# Altium PCB optical.PcbDoc
Units mm, origin at the board's own origin, x right, y up, seen from the top; angles counter-clockwise.
Board outline 29.57 x 17.04 mm, 2 copper layers (Top Layer, Bottom Layer); 20 components, 24 nets, 92 pads, 52 vias.
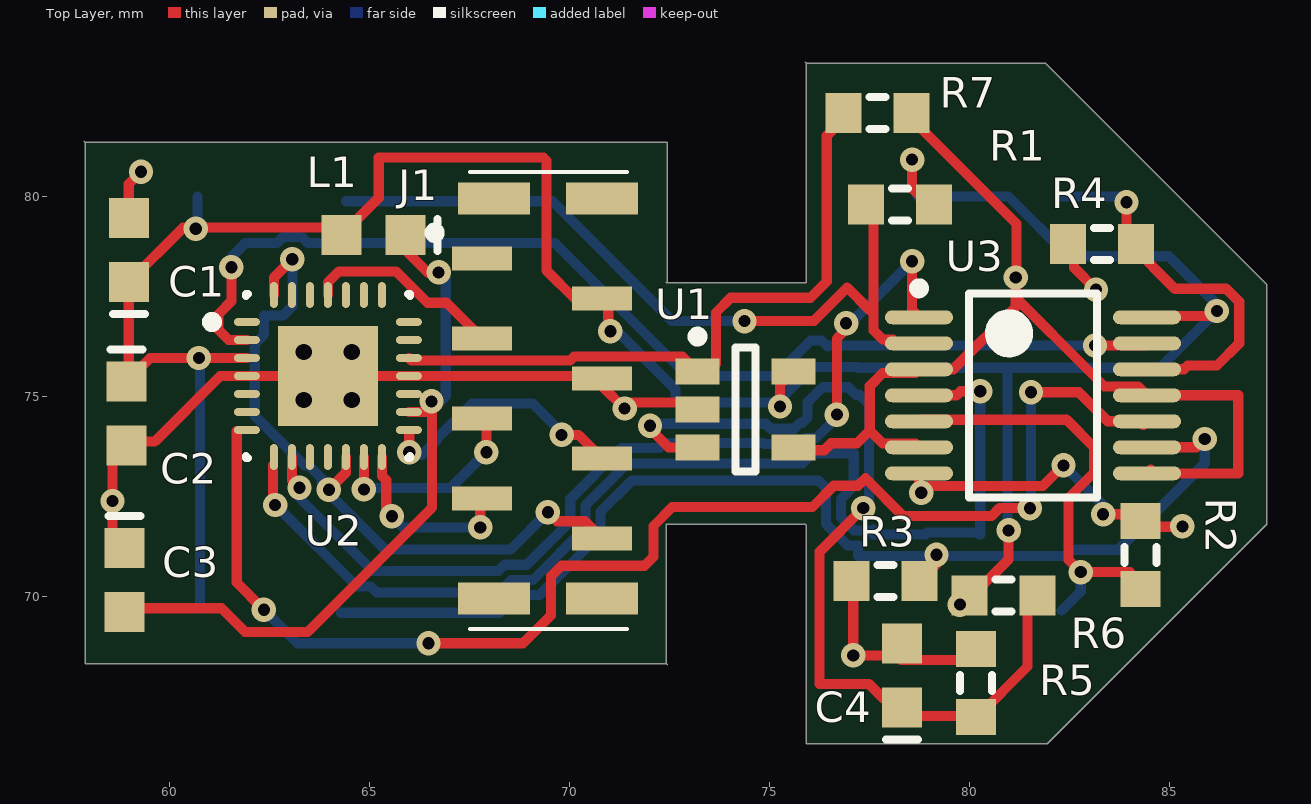
[diagram p0: Top Layer view]
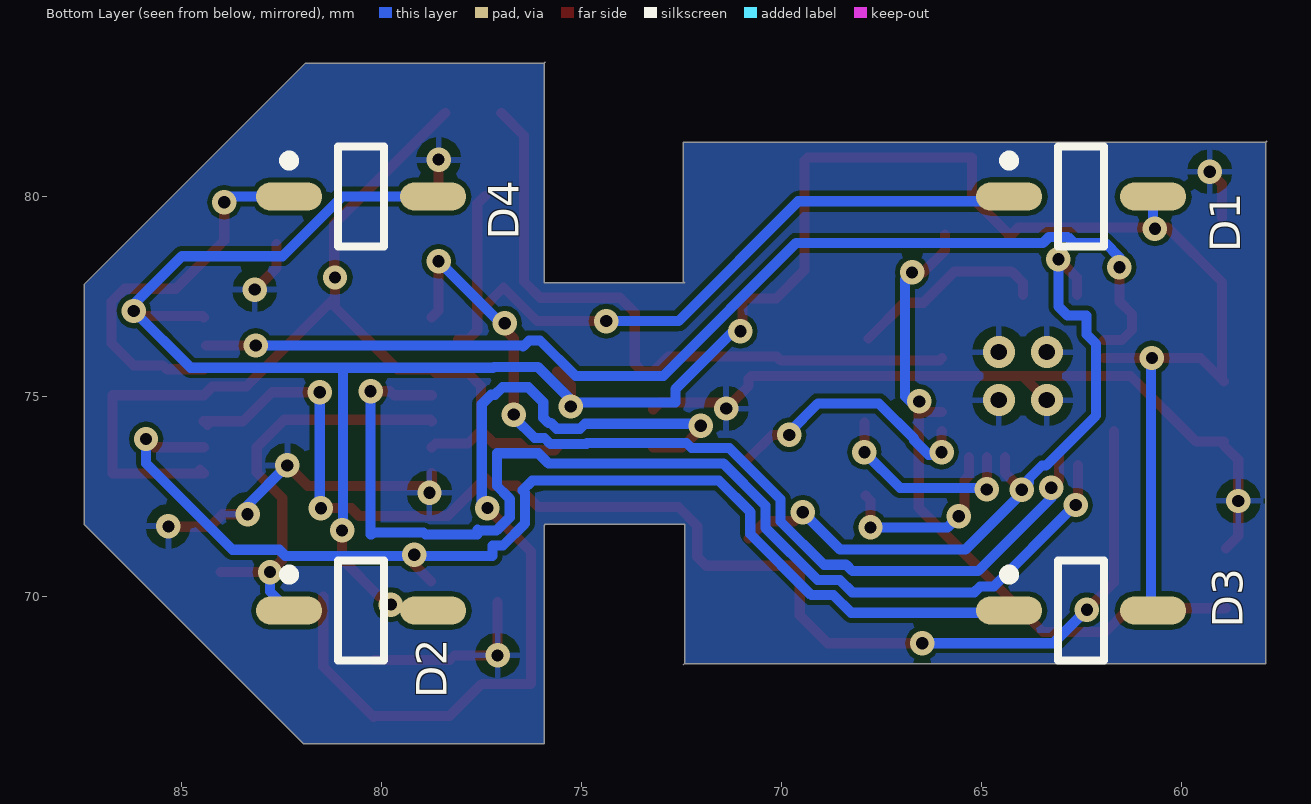
[diagram p1: Bottom Layer view, seen from below]

## Layer stack, top to bottom
Top Solder: solder mask 0.0102, Solder Resist, Dk 3.5
Top Layer: signal copper 0.0356
Dielectric1: dielectric 0.32, FR-4, Dk 4.8
Bottom Layer: signal copper 0.0356
Bottom Solder: solder mask 0.0102, Solder Resist, Dk 3.5

## Board outline
57.887,81.356 57.887,68.326 72.415,68.326 72.441,68.301 72.415,68.326 72.415,71.806 75.895,71.806 75.921,71.78 75.921,66.319 81.94,66.319 87.427,71.806 87.427,77.8 81.89,83.337 81.864,83.337 75.921,83.337 75.895,83.363 75.921,83.337 75.921,77.851 72.415,77.851 72.441,77.876 72.441,81.356 57.887,81.356 57.861,81.382

## Design rules (kind name [scope] priority, off if disabled: settings)
AssemblyTestPointUsage [All] p1 off:
AssemblyTestpoint [All] p1 off: testpointundercomponent=TRUE minsize=1.016 maxsize=2.54 preferedsize=1.524 minholesize=0 maxholesize=1.016 preferedholesize=0.813 testpointgrid=0.025 usegrid=TRUE gridtolerance=0 allowsidetop=TRUE allowsidebottom=TRUE
Clearance [All] p1: gap=0.125
DiffPairsRouting [All] p1: maxlimit=10 minlimit=0.125 mostfreqgap=0.15 toplayer_minwidth=0.381 toplayer_maxwidth=0.381 toplayer_prefwidth=0.381 bottomlayer_minwidth=0.381 bottomlayer_maxwidth=0.381 bottomlayer_prefwidth=0.381 maxuncoupledlength=12.7
FabricationTestPointUsage FabricationTestPointUsage_1 [All] p1 off: valid=0 allowmultiple=FALSE
FabricationTestpoint FabricationTestpoint_1 [All] p1 off: side=3 testpointundercomponent=TRUE minsize=1.016 maxsize=2.54 preferedsize=1.524 minholesize=0 maxholesize=1.016 preferedholesize=0.813 testpointgrid=0.025 allowsidetop=TRUE allowsidebottom=TRUE usegrid=TRUE gridtolerance=0
HoleSize [All] p1: absolutevalues=TRUE maxlimit=6 minlimit=0.2 maxpercent=80.000 minpercent=20.000
HoleSize FabricationTestpoint [All] p2 off: absolutevalues=TRUE maxlimit=2.54 minlimit=0.025 maxpercent=80.000 minpercent=20.000
HoleSize FabricationTestPointUsage [All] p3 off: absolutevalues=TRUE maxlimit=2.54 minlimit=0.025 maxpercent=80.000 minpercent=20.000
MinimumSolderMaskSliver [All] p1 off: minsoldermaskwidth=0.254
PlaneClearance [All] p1: clearance=0.5
PlaneConnect [All] p1: planeconnectstyle=Relief reliefexpansion=0.4 reliefentries=4 reliefconductorwidth=0.15 reliefairgap=0.15
PolygonConnect [All] p1: connectstyle=Relief reliefconductorwidth=0.15 reliefentries=4 polygonreliefangle="90 Angle" airgapwidth=0.254
RoomDefinition uw_pr2_optical_finger_1.1 [InComponentClass('uw_pr2_optical_finger_1.1')] p1: confinementstyle=ConfineIn formatcopy=TRUE lockcomponents=FALSE outline 0,0 50.8,0 50.8,25.4 0,25.4
RoutingCorners [All] p1: cornerstyle=45-Degree minsetback=1.25 maxsetback=1.25
RoutingVias [All] p1: holewidth=0.3 width=0.6 viastyle="Through Hole" minholewidth=0.2 minwidth=0.45 maxholewidth=0.45 maxwidth=0.75
SilkToSolderMaskClearance SilkscreenOverComponentPads [IsPad] p1: minsilkscreentomaskgap=0.1 clearancetoexposedcopper=FALSE
SolderMaskExpansion [All] p1: expansion=0.075
Width [All] p1: maxlimit=10 minlimit=0.125 preferedwidth=0.15
18 further rules are at their usual default settings.

## Components (designator, comment, footprint, x,y, rotation, side; value= is the part's Value field where it differs from the comment)
C1 "Cap Semi" CAPC1608N 58.979,78.664 r90 top
C2 "Cap Semi" CAPC1608N 58.928,74.574 r270 top
C3 "BypassCap" CAPC1608N 58.877,70.409 r270 top
C4 "Cap Semi" CAPC1608N 78.308,68.021 r90 top
D1 "Photo Diode" "Vishay VEMD/VSMB footprint" 62.5,80 r180 bottom (schematic designator D2)
D2 "Photo Diode" "Vishay VEMD/VSMB footprint" 80.5,69.65 r180 bottom
D3 "Photo Diode" "Vishay VEMD/VSMB footprint" 62.5,69.65 r180 bottom (schematic designator D2)
D4 "Photo Diode" "Vishay VEMD/VSMB footprint" 80.5,80 r180 bottom (schematic designator D2)
J1 "FFC 8-PIN Connector (1mm)" "Hirose FFC connector 8-Pin" 70.815,69.952 r90 top
L1 "Inductor" INDC1608N 65.1,79.045 r180 top
R1 "Rlevel" RESC1608N 78.257,79.807 r180 top
R2 "Rlevel" RESC1608N 84.277,71.044 r270 top
R3 "Rlevel" RESC1608N 77.902,70.383 r0 top
R4 "Rlevel" RESC1608N 83.312,78.816 r0 top
R5 "Rlevel" RESC1608N 80.162,67.843 r270 top
R6 "Rlevel" RESC1608N 80.848,70.028 r180 top
R7 "Rlevel" RESC1608N 77.699,82.093 r0 top
U1 "MCP6021T-E/OT" SOT-23-OT5_N 74.397,74.676 r0 top
U2 "ATmega168-28M1" PCBComponent_1 63.957,75.514 r0 top
U3 "SN74CBT3126PWLE" PW014_N 81.585,75.032 r0 top

## Footprints (in the part's own frame and the unit in brackets; to place one, negate y for a bottom-side part, rotate by r counter-clockwise, add the part's x,y. Pads: shape width x height; smd on the part's side, far side on the other; paste and mask are expansions set on the pad)
CAPC1608N [mm] "Chip Capacitor, Body 1.6x0.8mm, IPC Medium Density"
  rect 1x1 smd: 1(-0.8,0) 2(0.8,0)
  silkscreen extent -1.6,-0.4 -1.6,0.4, body extent -0.87,-0.48 0.87,0.48, height 0.85
"Hirose FFC connector 8-Pin" [mm] "Hirose FFC connector 8-Pin (FH12-8S-1SV)"
  rect 0.8x1.8 smd: 0(0,2.7) 0(0,0) 0(10,0) 0(10,2.7)
  rect 0.6x1.5 smd: 1(8.5,3) 2(7.5,0) 3(6.5,3) 4(5.5,0) 5(4.5,3) 6(3.5,0) 7(2.5,3) 8(1.5,0)
  silkscreen extent -0.76,-0.63 10.67,4.32
INDC1608N [mm] "Chip Inductor, Body 1.6x0.8mm, IPC Medium Density"
  rect 1x1 smd: 1(-0.8,0) 2(0.8,0)
  silkscreen extent -1.6,-0.4 -1.6,0.4, body extent -0.87,-0.48 0.87,0.48, height 0.71
PCBComponent_1 [mm]
  oval 0.65x0.2 smd mask+0.06: 1(-2.025,1.35) 2(-2.025,0.9) 3(-2.025,0.45) 4(-2.025,0) 5(-2.025,-0.45) 6(-2.025,-0.9) 7(-2.025,-1.35) 15(2.025,-1.35) 16(2.025,-0.9) 17(2.025,-0.45) 18(2.025,0) 19(2.025,0.45) 20(2.025,0.9) 21(2.025,1.35)
  oval 0.2x0.65 smd mask+0.06: 8(-1.35,-2.025) 9(-0.9,-2.025) 10(-0.45,-2.025) 11(0,-2.025) 12(0.45,-2.025) 13(0.9,-2.025) 14(1.35,-2.025) 22(1.35,2.025) 23(0.9,2.025) 24(0.45,2.025) 25(0,2.025) 26(-0.45,2.025) 27(-0.9,2.025) 28(-1.35,2.025)
  rect 2.5x2.5 smd: 29(0,0)
  silkscreen extent -3.02,-2.05 2.05,2.05, body extent -2.02,-2.02 2.02,2.02, height 1
PW014_N [mm] "TSOP, 14-Leads, Body 5x4.4mm, Pitch 0.65mm, IPC Medium Density"
  oval 1.7x0.35 smd: 1(-2.85,1.95) 2(-2.85,1.3) 3(-2.85,0.65) 4(-2.85,0) 5(-2.85,-0.65) 6(-2.85,-1.3) 7(-2.85,-1.95) 8(2.85,-1.95) 9(2.85,-1.3) 10(2.85,-0.65) 11(2.85,0) 12(2.85,0.65) 13(2.85,1.3) 14(2.85,1.95)
  silkscreen extent -2.97,-2.55 1.6,2.8, body extent -2.25,-2.55 2.25,2.55, height 1.2
RESC1608N [mm] "Chip Resistor, Body 1.6x0.8mm, IPC Medium Density"
  rect 0.9x1 smd: 1(-0.85,0) 2(0.85,0)
  silkscreen extent -0.2,-0.4 0.2,0.4, body extent -0.85,-0.48 0.85,0.48, height 0.6
SOT-23-OT5_N [mm] "SOT23, 5-Leads, Body 2.9x1.6mm, Pitch 0.95mm, Lead Span 2.7mm, IPC Medium Density"
  rect 1.1x0.65 smd: 1(-1.2,0.95) 2(-1.2,0) 3(-1.2,-0.95) 4(1.2,-0.95) 5(1.2,0.95)
  silkscreen extent -1.32,-1.55 0.25,1.95, body extent -0.9,-1.55 0.9,1.55, height 1.45
"Vishay VEMD/VSMB footprint" [mm] "SOP, 2-Leads, Body 2.30x2.30mm, Pitch 1.27mm, IPC Medium Density"
  oval 1.65x0.7 smd: 1(-1.8,0) 2(1.8,0)
  silkscreen extent -1.92,-1.25 0.58,1.25, body extent -1.25,-1.25 1.25,1.25, height 2.97

## Part data
C1 C2 C4: "Capacitor (Semiconductor SIM Model)"
C3: library part "Cap Semi", "Capacitor (Semiconductor SIM Model)"
D1 D2 D3 D4: library part Diode, "Default Diode"
J1: library part "FFC Connector-8Pin-SMT-1mm", "FFC 8-PIN Connector (1mm) (SMT)"
R1 R2 R3 R4 R5 R6 R7: library part Res3, "Resistor"
U1: "Rail-to-Rail Input/Output, 10 MHz Operational Amplifier, 5-Pin SOT-23, Extended Temperature, Tape and Reel"
U2: "8-Bit AVR Microcontroller with 8K Bytes of In-System Programmable Flash Memory"
U3: "Quadruple FET Bus Switch"

## Via types
v1: diameter 0.61, hole 0.305, Top Layer to Bottom Layer, tented both sides, 47 vias
v2: diameter 0.8, hole 0.41, Top Layer to Bottom Layer, tented both sides, 4 vias
v3: diameter 0.61, hole 0.305, Top Layer to Bottom Layer, tented bottom, 1 vias

## Nets (pads, with @x,y where several pads share a name; then routed paths per layer and width w, separated by ;. In a path a pad name is that pad's centre, name@x,y a point inside that pad or via, vN(x,y) a via of type N, cw(c..) or ccw(c..) an arc to the next point about the centre after c; other vN are vias at no path point)
ADC0: R7.1 U1.1 U2.19 | length 16.8
  Top Layer w0.254: U2.19 66.047,75.9 70.007,75.9 70.111,76.004 72.819,76.004 ; 72.858,75.964 U1.1 73.464,75.626 73.66,75.822 73.66,77.101 74.029,77.47 76.022,77.47 76.429,77.876 76.429,81.523 R7.1@76.999,82.093
AREF: C3.2 L1.1 U2.16 U2.17 | length 17
  Top Layer w0.254: C3.2@58.877,69.709 61.299,69.709 61.893,69.115 63.451,69.115 66.559,72.223 v1@66.559,74.868 ; L1.1 65.9,78.651 66.446,78.105 v1(66.726,78.105) ; U2.16 66.397,74.614
  Bottom Layer w0.254: v1(66.548,74.879) 66.777,74.879 66.904,75.006 v1@66.904,77.927
CS: J1.8 U2.12 U2.28 | length 17.5
  Top Layer w0.254: U2.28 62.607,77.974 v1(63.068,78.435) ; v1(63.983,72.669) 64.407,73.094 U2.12 ; v1(69.457,72.109) 69.684,71.882 70.385,71.882 J1.8
  Bottom Layer w0.254: v1(63.068,78.435) 63.068,77.258 62.833,77.023 62.363,77.023 62.363,76.553 62.128,76.318 62.128,74.524 63.375,73.277 63.477,73.277 63.803,72.951 63.803,72.849 v1(63.983,72.669) 63.983,72.585 65.395,71.173 68.521,71.173 v1(69.457,72.109)
D1: D1.1 R1.2 U3.2 | length 18.8
  Top Layer w0.254: v1@74.574,76.89 76.103,76.89 76.939,77.726 77.504,77.161 ; R1.2@77.407,80.01 77.597,79.82 77.597,76.658 77.829,76.426 78.08,76.426 U3.2@77.986,76.332
  Bottom Layer w0.254: D1.1@64.417,79.883 69.571,79.883 72.568,76.886 v1(74.371,76.886)
D2: D2.1 R2.2 U3.5 | length 10.6
  Top Layer w0.254: U3.5 78.773,74.42 82.425,74.42 83.109,73.736 83.109,73.101 82.474,72.466 82.474,70.917 v1(82.779,70.612) R2.2@84.009,70.612
  Bottom Layer w0.254: D2.1 82.779,70.129 v1(82.779,70.612)
D3: D3.1 R3.2 U3.9 | length 28.4
  Top Layer w0.254: R3.2 79.172,70.803 v1(79.172,71.044) ; U3.9 v1@85.67,73.732
  Bottom Layer w0.254: D3.1@64.287,69.596 68.25,69.596 68.69,70.036 69.244,70.036 70.772,71.564 70.772,72.118 71.552,72.898 76.225,72.898 76.464,72.659 76.458,72.653 76.458,72.651 76.407,72.6 76.407,71.825 76.955,71.276 77.213,71.276 77.213,71.018 82.398,71.018 82.548,71.169 83.716,71.169 85.877,73.33 v1(85.877,73.939)
D4: D4.1 R4.2 U3.12 | length 9.4
  Top Layer w0.254: R4.2@83.922,78.907 v1(83.922,79.858) ; R4.2@84.012,78.816 85.132,77.697 86.413,77.697 86.739,77.37 86.739,76.33 86.184,75.775 85.45,75.775 85.357,75.682 U3.12
  Bottom Layer w0.254: D4.1 v1@83.779,80
GND: C1.2 C2.2 C3.1 C4.2 J1.4 R1.1 R2.1 R3.1 R4.1 R5.1 U1.2 U2.4 U2.18 U2.29 U3.7 | length 35.1
  Top Layer w0.254: C3.1 58.572,71.514 v1(58.572,72.39) 58.572,73.419 C2.2 ; C2.2@58.928,73.874 59.625,73.874 61.265,75.514 U2.4 U2.29 ; C1.2 58.979,80.315 v1(59.284,80.62) ; U2.29@63.507,75.064 U2.29 ; U1.2 73.017,74.856 71.528,74.856 v1(71.374,74.701) 70.815,75.26 J1.4 70.753,75.514 U2.18 U2.29 ; 77.089,69.864 v1(77.089,68.529) C4.2@78.17,68.529 ; C4.2@78.283,68.416 R5.1@80.162,68.416 ; v1(78.562,80.924) 78.562,80.202 R1.1@78.957,79.807 ; v1@78.735,72.751 U3.7 ; v1(78.791,72.593) 78.965,72.767 81.835,72.767 v1(82.347,73.279) ; R4.1@82.612,78.816 82.612,78.221 v1(83.16,77.673) ; v1(83.337,72.06) 83.961,72.06 84.277,71.744 v1@85.307,71.744
  Bottom Layer w0.254: v1(82.347,73.279) 83.337,72.288 v1(83.337,72.06)
  other v1: 85.319,71.755
  other v2: 63.357,74.914 64.557,74.914 63.357,76.114 64.557,76.114
MISO: J1.7 U2.14 | length 4.5
  Top Layer w0.254: U2.14 65.307,73.018 65.414,72.911 v1@65.414,72.152 ; v1(67.767,71.73) J1.7@67.767,72.404 ; J1.7 J1.7@67.894,72.531
  Bottom Layer w0.254: v1(65.557,72.009) 65.837,71.73 v1(67.767,71.73)
MOSI: J1.5 U2.13 | length 5
  Top Layer w0.254: v1(64.857,72.68) U2.13 ; v1(67.92,73.609) J1.5@67.92,74.347
  Bottom Layer w0.254: v1(64.857,72.68) 64.895,72.718 67.029,72.718 v1(67.92,73.609)
NetC4_1: C4.1 R5.2 R6.1 U1.3 | length 23.8
  Top Layer w0.254: v1(72.009,74.27) 71.987,74.27 71.937,74.32 72.087,74.17 72.06,74.143 72.476,73.726 U1.3 ; v1(77.343,72.212) 76.251,71.12 76.251,67.818 77.481,67.818 78.283,67.016 R5.2@80.162,67.016 ; R5.2@80.188,66.991 81.447,68.25 R6.1@81.447,70.002
  Bottom Layer w0.254: v1@71.987,74.27 v1(72.009,74.27) ; v1@77.216,72.339 v1(77.343,72.212) ; v1@77.484,72.212 77.484,74.807 77.246,75.045 77.157,75.045 76.967,75.235 76.322,75.235 75.946,74.858 75.946,74.468 75.82,74.342 75.759,74.342 75.613,74.195 75.03,74.195 74.905,74.32 v1@71.937,74.32 ; v1@71.937,74.32 72.04,74.217 v1@71.937,74.32
NetD1_1: 
NetD2_1: 
NetD3_1: 
NetD4_1: 
NetR5_2: 
RESET_PROGRAMMER: J1.3 U2.25 | length 5
  Top Layer w0.254: U2.25 63.957,77.851 64.237,78.13 65.661,78.13 66.448,77.344 66.923,77.344 J1.3
S1: U2.9 U3.1 | length 23.5
  Top Layer w0.254: U2.9 63.057,72.909 v1(63.246,72.72) ; v1(76.683,74.549) 76.683,76.454 76.987,76.759 v1(76.911,76.835) ; v1(78.562,78.384) 78.562,77.154 U3.1
  Bottom Layer w0.254: v1(63.246,72.72) 63.246,72.466 65.075,70.637 68.219,70.637 68.376,70.794 68.93,70.794 70.014,71.878 70.014,72.432 71.295,73.713 72.24,73.713 72.365,73.838 74.851,73.838 74.873,73.816 75.77,73.816 75.916,73.963 76.159,73.963 76.683,74.486 v1(76.683,74.549) ; v1@76.962,76.784 v1(78.562,78.384)
S2: U2.8 U3.4 | length 28.6
  Top Layer w0.254: v1@62.582,72.288 U2.8@62.582,73.286 ; U3.4 79.675,75.032 79.777,75.133 v1(80.264,75.133)
  Bottom Layer w0.254: v1@62.77,72.168 64.685,70.252 65.024,70.252 65.172,70.104 68.222,70.104 68.533,70.415 69.087,70.415 70.393,71.721 70.393,72.275 71.448,73.33 75.819,73.33 76.073,73.584 77.105,73.584 77.105,72.764 76.837,72.496 76.837,72.494 76.786,72.443 76.786,71.982 77.112,71.655 77.574,71.655 77.592,71.674 77.592,71.552 78.892,71.552 78.941,71.601 80.19,71.601 80.239,71.552 ; 80.264,71.552 v1(80.264,75.133)
  other v1: 62.636,72.288
S3: U2.7 U3.10 | length 34.2
  Top Layer w0.254: U2.7@61.678,74.133 61.678,70.351 v1(62.357,69.672) v1@62.357,69.774 ; v3(66.472,68.834) 66.472,69.012 66.65,68.834 68.836,68.834 69.534,69.532 69.534,70.509 69.795,70.771 71.873,70.771 72.096,70.994 72.096,71.766 72.568,72.238 76.073,72.238 76.604,72.769 77.207,72.769 77.396,72.959 78.344,72.011 80.545,72.011 80.745,72.21 v1(81.507,72.21) ; v1(81.534,75.108) 82.728,75.108 83.454,74.382 U3.10 U3.10@84.341,74.288
  Bottom Layer w0.254: v1@62.459,69.774 v1(62.357,69.672) 63.195,68.834 v3(66.472,68.834) ; v1(81.507,72.21) 81.534,72.238 v1(81.534,75.108)
S4: U2.2 U3.13 | length 27.7
  Top Layer w0.254: v1(61.544,78.232) 61.544,77.381 61.226,77.063 61.226,76.665 61.477,76.414 U2.2 ; v1(83.134,76.276) U3.13@84.379,76.276
  Bottom Layer w0.254: v1(61.544,78.232) 61.544,78.486 61.9,78.842 62.687,78.842 62.838,78.992 63.299,78.992 63.449,78.842 69.621,78.842 72.949,75.514 75.138,75.514 76.027,76.403 76.297,76.403 76.449,76.251 76.475,76.276 v1(83.134,76.276)
SCK: J1.6 U2.15 | length 6.5
  Top Layer w0.254: U2.15@65.982,74.133 65.989,74.126 v1(65.989,73.609) ; v1(69.799,74.041) 70.226,74.041 J1.6
  Bottom Layer w0.254: v1(65.989,73.609) 66.055,73.543 66.309,73.543 66.675,73.908 66.675,73.944 67.559,74.828 69.082,74.828 69.799,74.111 v1(69.799,74.041)
V-: R7.2 U1.4 U3.3 U3.6 U3.8 U3.11 | length 26.1
  Top Layer w0.254: U1.4 75.674,73.649 75.685,73.66 76.366,73.66 76.414,73.708 76.539,73.834 77.186,73.834 77.504,74.151 ; R7.2@78.399,82.093 81.173,79.319 81.173,77.998 v1(81.153,77.978) 81.153,77.47 ; U3.6 78.641,73.826 77.829,73.826 77.504,74.151 ; U3.8 U3.8@84.529,73.176 ; U3.8@84.441,73.076 86.716,73.076 86.716,75.032 U3.11 84.212,75.255 83.368,75.255 83.361,75.262 83.035,75.588 81.153,77.47 ; 77.504,74.151 77.504,75.262 77.829,75.588 78.641,75.588 U3.3 79.593,75.682 81.153,77.241 81.153,77.47
VCC: C1.1 C2.1 D1.2 D2.2 D3.2 D4.2 J1.2 L1.2 R6.2 U1.5 U2.3 U3.14 | length 65.2
  Top Layer w0.254: C2.1 C2.1@58.979,75.425 ; U2.3 v1(60.731,75.964) 59.518,75.964 C2.1@58.979,75.425 ; L1.2@64.3,78.994 64.072,79.223 60.338,79.223 C1.1 C2.1@58.979,75.425 ; L1.2 65.227,79.972 65.227,80.975 69.342,80.975 ; 69.418,80.899 69.418,78.156 70.122,77.452 J1.2 ; J1.2@70.968,77.299 70.968,76.683 v1(71.018,76.632) ; v1(75.26,74.752) 75.26,75.29 U1.5 ; R6.2 80.021,70.028 80.047,70.002 80.975,70.931 v1(80.975,71.653) ; U3.14 84.471,77.017 v1@86.009,77.017
  Bottom Layer w0.254: v1@60.7,79.242 D1.2 ; v1(60.731,75.964) 60.757,75.939 D3.2@60.757,69.707 ; v1(71.018,76.632) 71.018,76.81 72.644,75.184 72.644,74.854 75.159,74.854 v1(75.26,74.752) 75.26,74.918 76.085,75.743 77.177,75.743 77.2,75.719 84.762,75.719 v1(86.182,77.14) 86.182,77.309 84.982,78.509 82.464,78.509 80.974,80 D4.2 ; v1@80.95,71.653 80.95,75.667
  other v1: 79.756,69.799 60.655,79.197
pads on no net: J1.0 J1.1 U2.1 U2.5 U2.6 U2.10 U2.11 U2.20 U2.21 U2.22 U2.23 U2.24 U2.26 U2.27

## Polygon pours and split planes (outlines as drawn)
GND on Bottom Layer "GND-Bottom" (solid, pour order 4): 57.887,81.356 57.887,68.326 72.415,68.326 72.441,68.301 72.415,68.326 72.415,71.806 75.895,71.806 75.921,71.78 75.921,66.319 81.94,66.319 87.427,71.806 87.427,77.8 81.89,83.337 81.864,83.337 75.921,83.337 75.895,83.363 75.921,83.337 75.921,77.851 72.415,77.851 72.441,77.876 72.441,81.356 57.887,81.356 57.861,81.382